# Altium PCB PCB2(final).PcbDoc
Units mm, origin at the board's own origin, x right, y up, seen from the top; angles counter-clockwise.
Board outline 48.9 x 47.37 mm, 2 copper layers (Top Layer, Bottom Layer); 15 components, 27 nets, 76 pads, 13 vias.
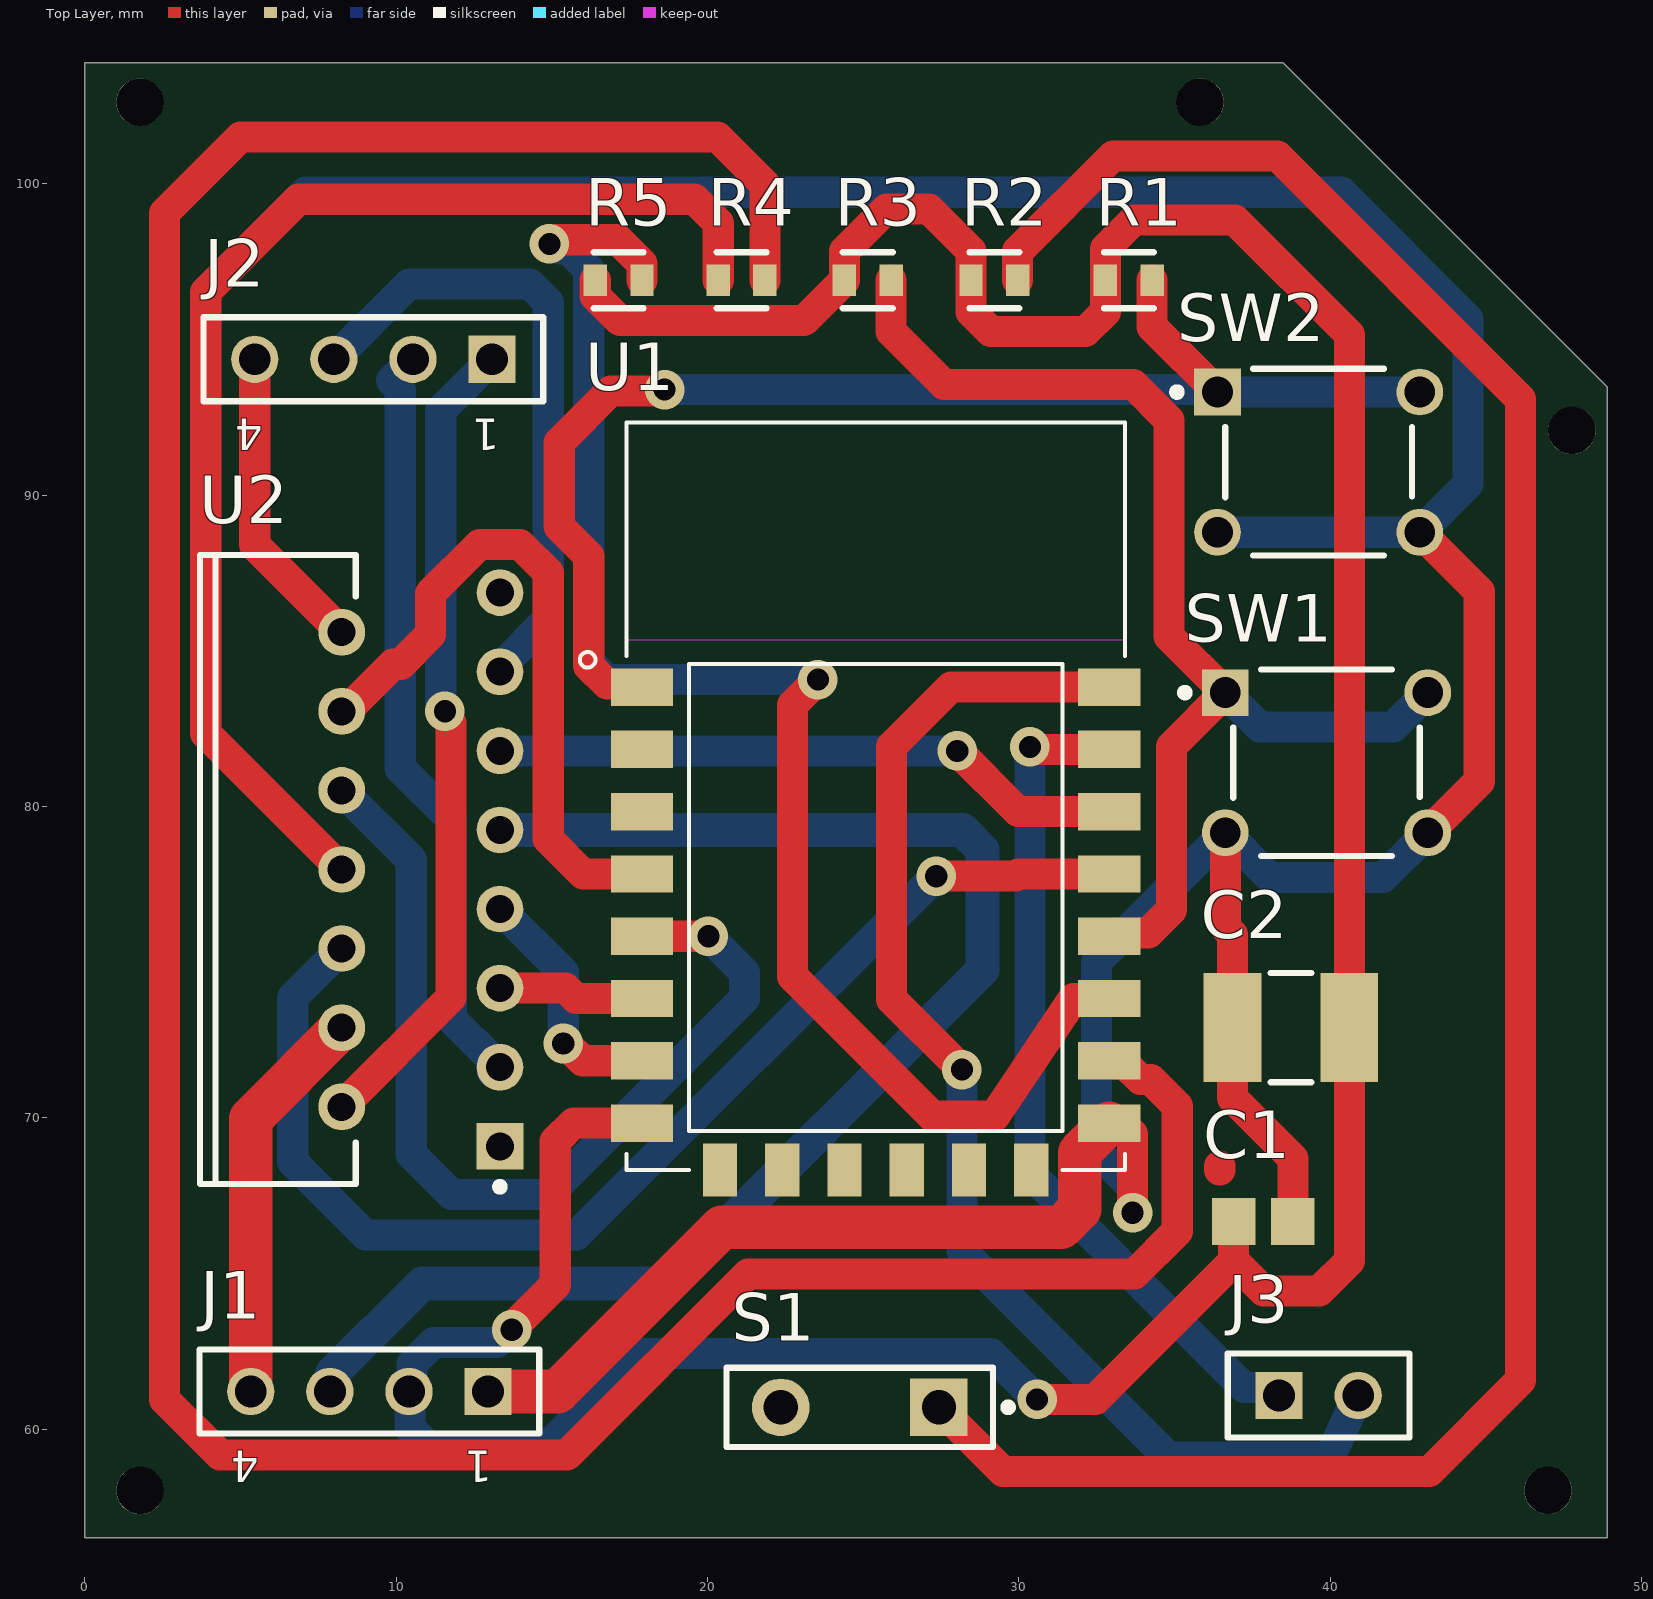
[diagram p0: Top Layer view]
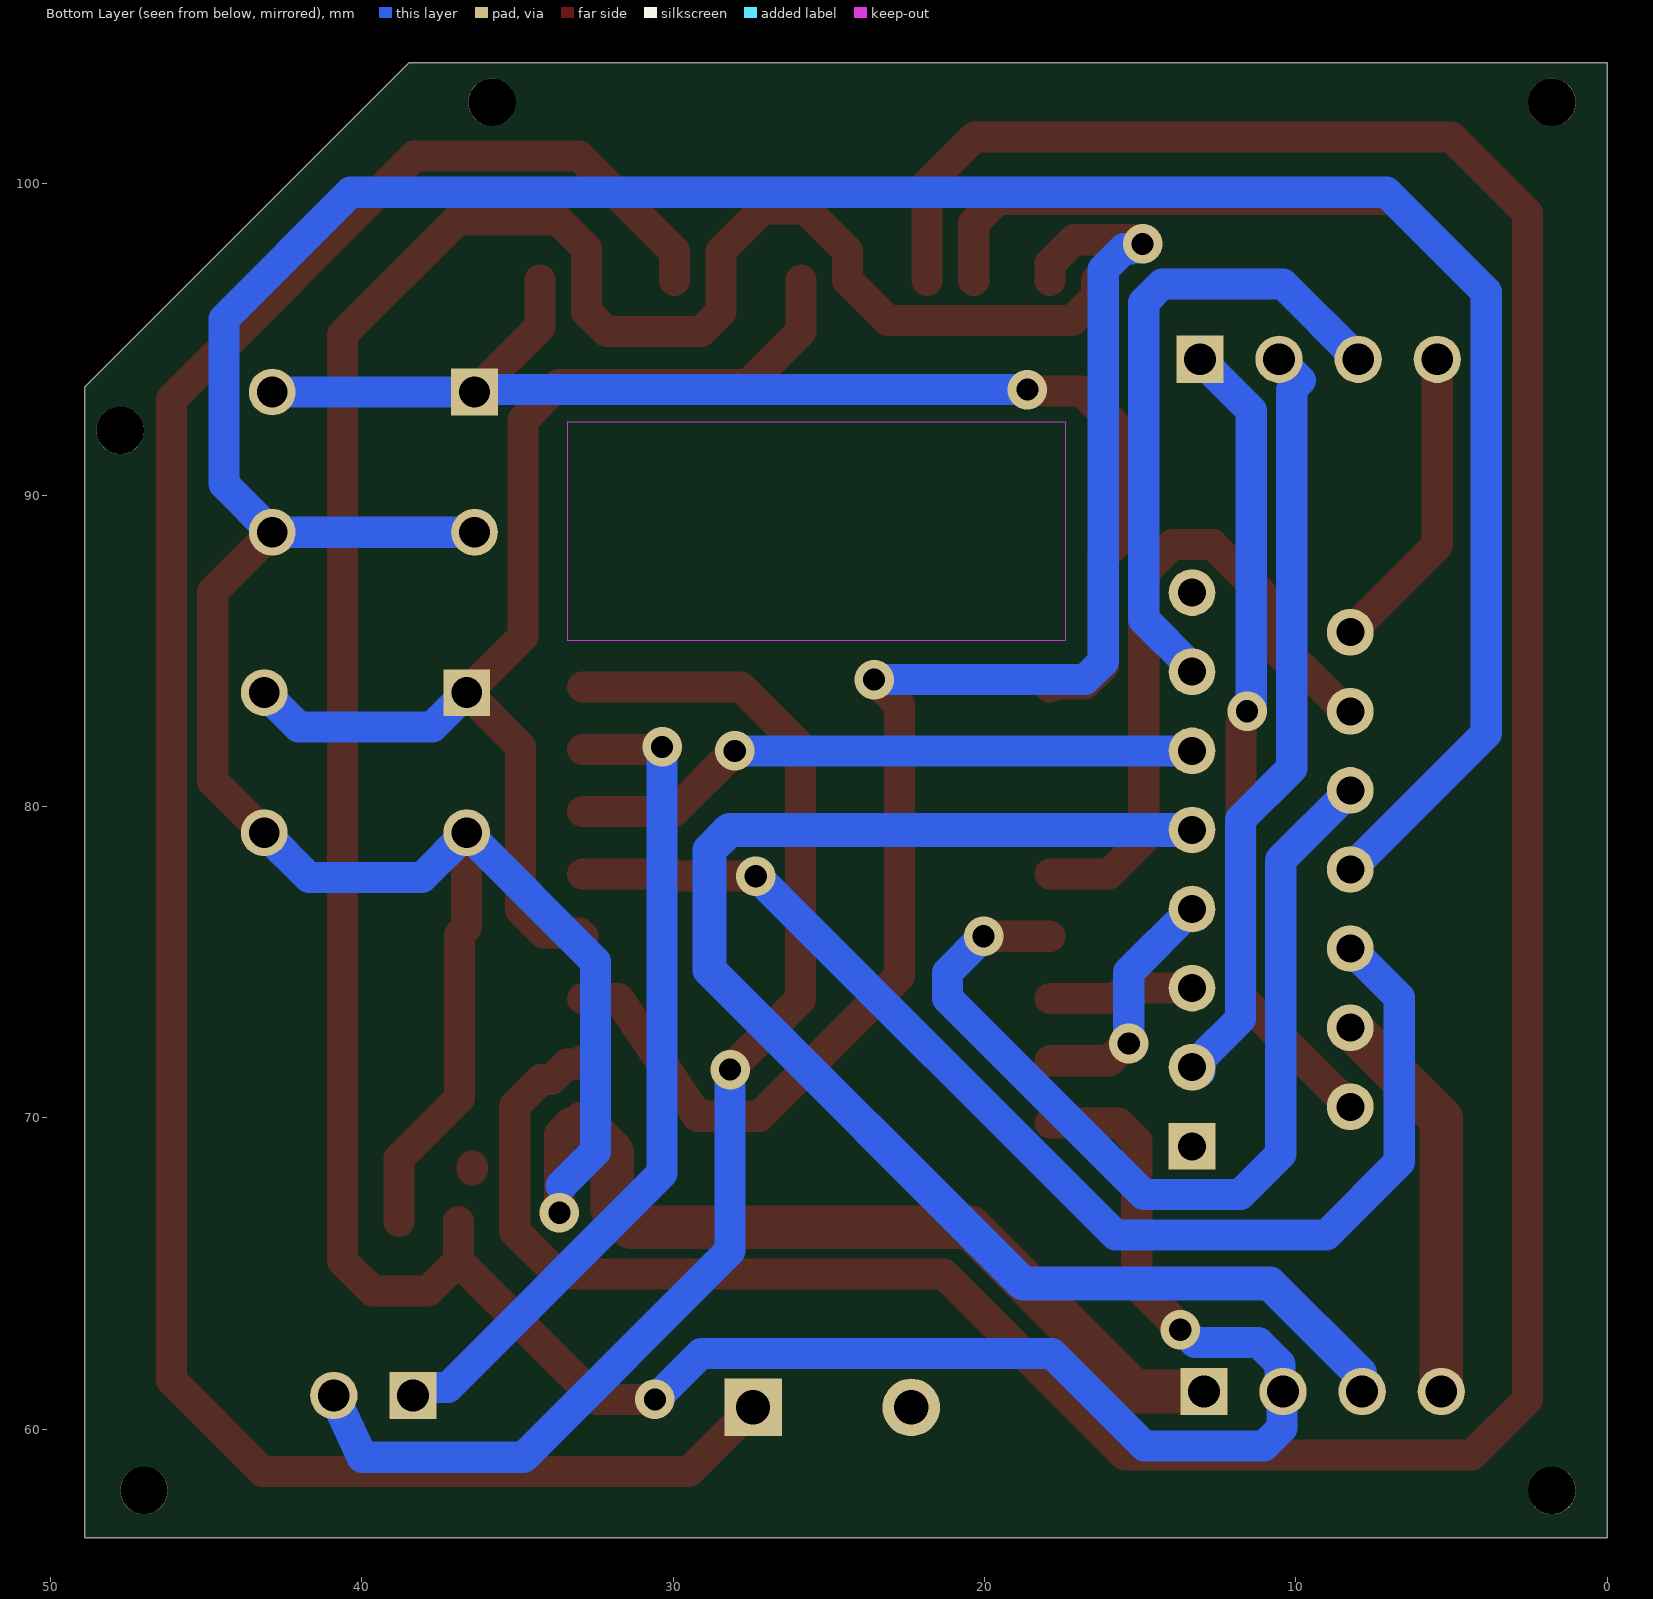
[diagram p1: Bottom Layer view, seen from below]
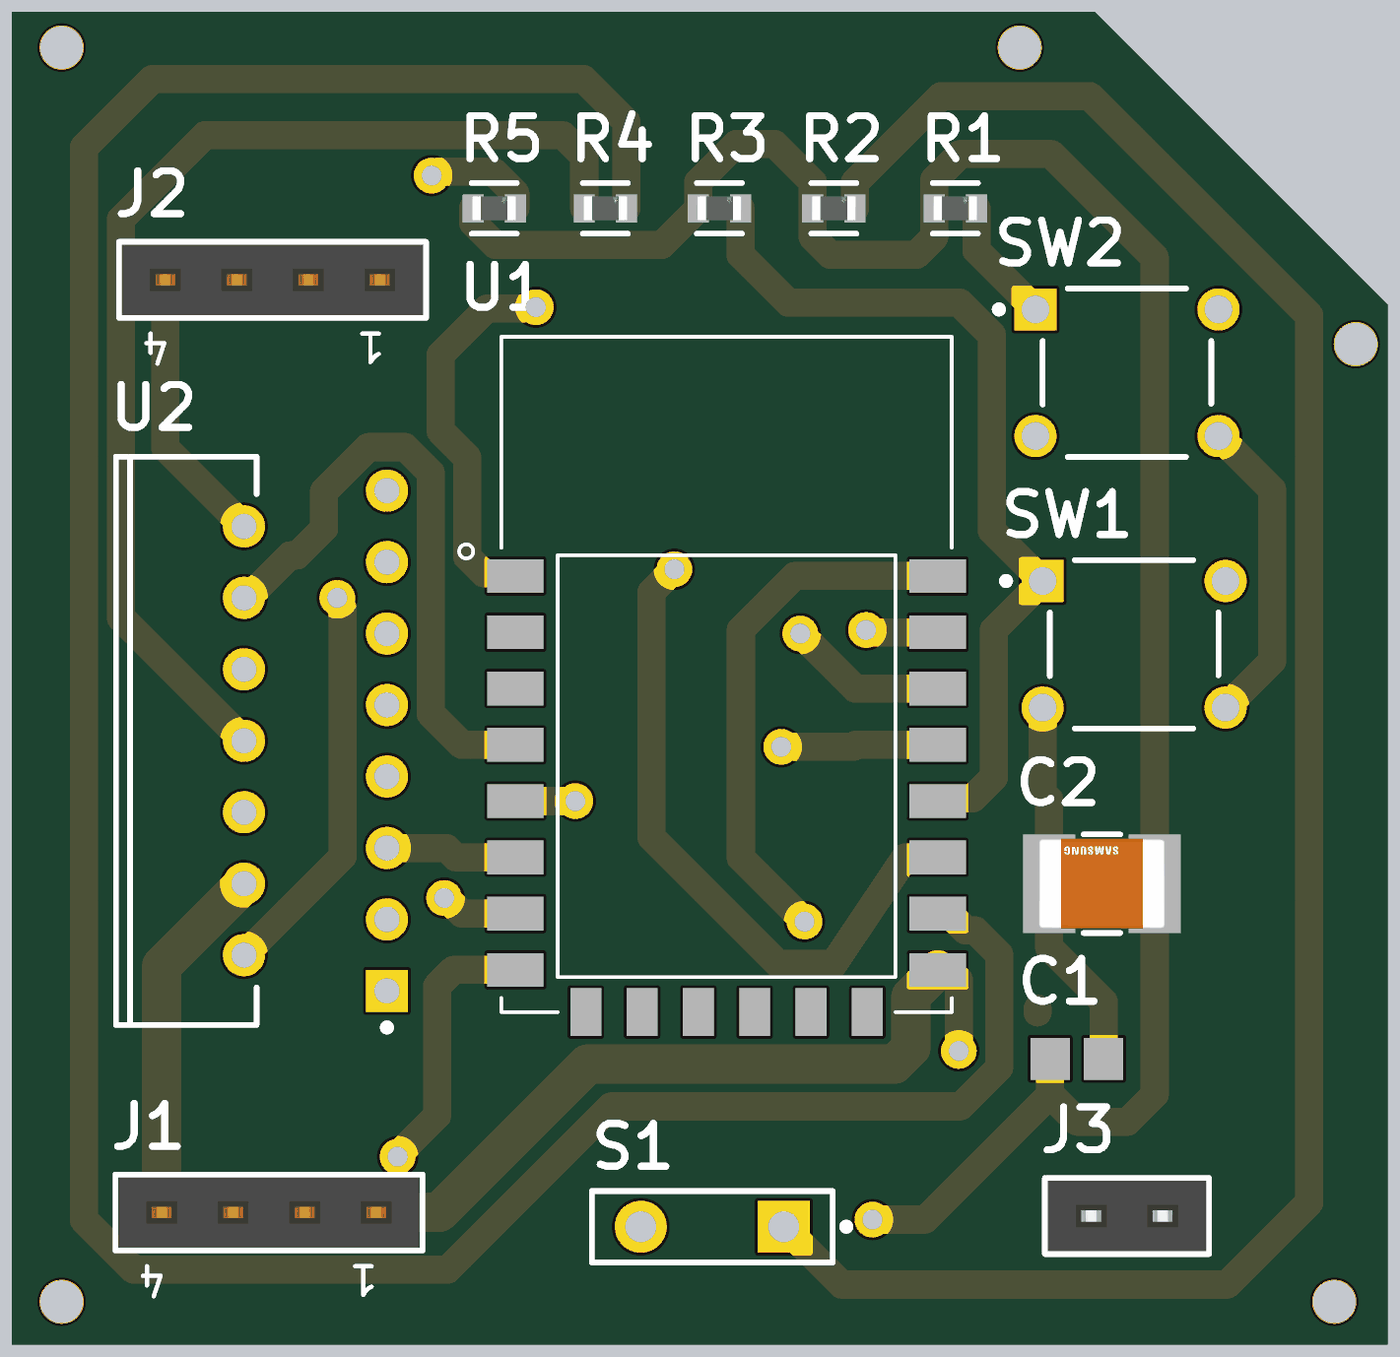
[diagram p2: 3D render of the assembled board from above, using the file's embedded part models]

## Layer stack, top to bottom
Top Solder: solder mask 0.0102, Solder Resist, Dk 3.5
Top Layer: signal copper 0.0356
Dielectric 1: dielectric 0.32, FR-4, Dk 4.8
Bottom Layer: signal copper 0.0356
Bottom Solder: solder mask 0.0102, Solder Resist, Dk 3.5

## Board outline
38.481,103.886 48.895,93.472 48.895,56.515 0,56.515 0,103.886

## Design rules (kind name [scope] priority, off if disabled: settings)
Clearance [All] p1: gap=0.3 ignorepadtopadclearanceinfootprint=FALSE except(0: Arc-Hole Track-Hole SMDPad-Hole THPad-Hole Via-Hole Fill-Hole Poly-Hole Region-Hole Text-Hole)
PolygonConnect [All] p1: connectstyle=Relief reliefconductorwidth=0.254 reliefentries=4 polygonreliefangle="90 Angle" airgapwidth=0.254
RoutingVias [All] p1: holewidth=0.711 width=1.27 viastyle="Through Hole" minholewidth=0.711 minwidth=1.27 maxholewidth=0.711 maxwidth=1.27
SilkToSolderMaskClearance [IsPad] p1: minsilkscreentomaskgap=0.127 clearancetoexposedcopper=TRUE
SolderMaskExpansion [All] p1: expansion=0.102 istentingtop=FALSE
Width [All] p1: maxlimit=1.5 minlimit=0.8 preferedwidth=1 minimp=50.000000 maximp=50.000000 favimp=50.000000
29 further rules are at their usual default settings.

## Components (designator, comment, footprint, x,y, rotation, side; value= is the part's Value field where it differs from the comment)
C1 "10uF" CAPC2013X95X45ML10T25 37.846,66.675 r180 top
C2 "100nF" FP-CL43-IPC_B 38.735,72.898 r180 top
J1 "61300411821" 61300411821 9.144,61.214 r180 top
J2 "61300411821" 61300411821 9.271,94.361 r180 top
J3 "61300211821" 61300211821 39.624,61.087 r0 top
R1 "CRCW060310K0JNEA" FP-CRCW0603-e3-MFG 33.528,96.901 r0 top
R2 "CRCW060310K0JNEA" FP-CRCW0603-e3-MFG 29.21,96.901 r0 top
R3 "CRCW060310K0JNEA" FP-CRCW0603-e3-MFG 25.146,96.901 r0 top
R4 "CRCW060310K0JNEA" FP-CRCW0603-e3-MFG 21.094,96.901 r0 top
R5 "CRCW060310K0JNEA" FP-CRCW0603-e3-MFG 17.145,96.901 r0 top
S1 "SW-SPST" SPST-2 24.892,60.706 r180 top
SW1 "1825910-6" TECO-1825910-6_V 39.878,81.407 r0 top
SW2 "1825910-6" TECO-1825910-6_V 39.624,91.059 r0 top
U1 "ESP8266-12E/ESP-12E" XCVR_ESP8266-12E/ESP-12E 25.4,76.835 r0 top
U2 "L298N" STM-FM-15 10.795,77.978 r180 top

## Footprints (in the part's own frame and the unit in brackets; to place one, negate y for a bottom-side part, rotate by r counter-clockwise, add the part's x,y. Pads: shape width x height; smd on the part's side, far side on the other; paste and mask are expansions set on the pad)
61300211821 [mm] "Socket Header, Pitch 2.54 mm, THT, Vertical, single row, 2p"
  rect 1.52x1.52 hole 1.02: 1(-1.27,0)
  round 1.52 hole 1.02: 2(1.27,0)
  silkscreen extent -2.92,-1.35 2.92,1.35, body extent -2.79,-1.25 2.79,1.25, height 8.55
61300411821 [mm] "Socket Header, Pitch 2.54 mm, THT, Vertical, single row, 4p"
  rect 1.52x1.52 hole 1.02: 1(-3.81,0)
  round 1.52 hole 1.02: 2(-1.27,0) 3(1.27,0) 4(3.81,0)
  silkscreen extent -5.46,-1.35 5.46,1.35, body extent -5.33,-1.25 5.33,1.25, height 8.55
CAPC2013X95X45ML10T25 [mm] "Chip Capacitor, 2-Leads, Body 2.00x1.25mm, IPC Low Density"
  rect 1.4x1.5 smd: 1(-0.95,0) 2(0.95,0)
  body extent -1.05,-0.67 1.05,0.67, height 0.95
FP-CL43-IPC_B [mm]
  rect 1.853x3.504 smd paste+0 mask+0: 1(-1.875,0) 2(1.875,0)
  silkscreen extent -0.65,-1.75 0.65,1.75, body extent -3.05,-2 3.05,2, height 0.25
FP-CRCW0603-e3-MFG [mm]
  rect 0.75x1 smd paste+0 mask+0: 1(-0.75,0) 2(0.75,0)
  silkscreen extent -0.8,-0.9 0.8,0.9, body extent -1.22,-0.6 1.22,0.6, height 0.25
SPST-2 [mm] "Switch; 2 Leads"
  rect 1.85x1.85 hole 1.1: 1(-2.54,0)
  round 1.85 hole 1.1: 2(2.54,0)
  silkscreen extent -4.89,-1.27 4.28,1.27
STM-FM-15 [mm] "FM, 15-Leads, Body 20.2x5mm, Pitch 1.27mm"
  rect 1.5x1.5 hole 0.9: 1(-2.54,8.89)
  round 1.5 hole 0.9: 2(2.54,7.62) 3(-2.54,6.35) 4(2.54,5.08) 5(-2.54,3.81) 6(2.54,2.54) 7(-2.54,1.27) 8(2.54,0) 9(-2.54,-1.27) 10(2.54,-2.54) 11(-2.54,-3.81) 12(2.54,-5.08) 13(-2.54,-6.35) 14(2.54,-7.62) 15(-2.54,-8.89)
  silkscreen extent -2.67,-10.1 7.09,10.31, body extent -2.8,-10.1 7.09,10.1, height 21
TECO-1825910-6_V [mm] "Switch, 4-Leads, Body 5.99x5.99mm"
  rect 1.5x1.5 hole 0.99: 1(-3.25,2.25)
  round 1.5 hole 0.99: 2(3.25,2.25) 3(-3.25,-2.25) 4(3.25,-2.25)
  silkscreen extent -4.67,-3 3,3, body extent -3,-2.99 2.99,3, height 5
XCVR_ESP8266-12E/ESP-12E [mm]
  rect 2x1.2 smd: 1(-7.5,7) 2(-7.5,5) 3(-7.5,3) 4(-7.5,1) 5(-7.5,-1) 6(-7.5,-3) 7(-7.5,-5) 8(-7.5,-7) 15(7.5,-7) 16(7.5,-5) 17(7.5,-3) 18(7.5,-1) 19(7.5,1) 20(7.5,3) 21(7.5,5) 22(7.5,7)
  rect 1.1x1.7 smd: 9(-5,-8.5) 10(-3,-8.5) 11(-1,-8.5) 12(1,-8.5) 13(3,-8.5) 14(5,-8.5)
  Keep-Out Layer region: 8,8.51 -8.009,8.51 -8.009,15.5 8,15.5
  Keep-Out Layer region: 8,8.51 -8.009,8.51 -8.009,15.5 8,15.5
  silkscreen extent -9.5,-8.5 8,15.5

## Part data
C1: library part CMP-2007-00182-1, Manufacturer=Murata, Part Number=GRM219R61E106KA12D
C2: library part CMP-13271-000927-1, "Cap Ceramic 100nF 500V X7R ±10% SMD 1812 +125°C Embossed T/R", Case/Package=1812, Dielectric=X7R, Max Operating Temperature=125°C, Min Operating Temperature=-55°C, Package Quantity=4000, Tolerance=10%, Voltage=500V, Capacitance=100nF, Depth=3.2mm, Height=2mm, Length=4.5mm, Mount="Surface Mount", Packaging="Tape and Reel", Radiation Hardening=No, Thickness=0.087inch, Voltage Rating=500V, Voltage Rating (DC)=500V, Width=0.126inch
J1 J2: "WR-PHD Socket Header, THT, pitch 2.54mm, Single Row, Vertical, 4p", Contact Resistance=20mOhm, Manufacturer="Wurth Elektronik", Operating Temperature="-40 to +125degC", Rated Current=3A, Withstanding Voltage=500VAC, Working Voltage=250VAC, ComponentLink1Description=Manufacturer, ComponentLink1URL=http://www.we-online.de, ComponentLink2Description=Datasheet, ComponentLink2URL=https://www.we-online.com/catalog/datasheet/61300411821.pdf, Gender="Socket Header", Manufacturer Part Number=61300411821, Mounting Technology=THT, Orientation=Vertical, Packaging=Tray, Pin Number=4, Pitch=2.54mm, Published Date="May 2020", Row Number=Single
J3: "WR-PHD Socket Header, THT, pitch 2.54mm, Single Row, Vertical, 2p", Contact Resistance=20mOhm, Manufacturer="Wurth Elektronik", Operating Temperature="-40 to +125degC", Rated Current=3A, Withstanding Voltage=500VAC, Working Voltage=250VAC, ComponentLink1Description=Manufacturer, ComponentLink1URL=http://www.we-online.de, ComponentLink2Description=Datasheet, ComponentLink2URL=https://www.we-online.com/catalog/datasheet/61300211821.pdf, Gender="Socket Header", Manufacturer Part Number=61300211821, Mounting Technology=THT, Orientation=Vertical, Packaging=Tray, Pin Number=2, Pitch=2.54mm, Published Date="May 2020", Row Number=Single
R1 R2 R3 R4 R5: library part CMP-2000-03838-2, "RES Thick Film, 10kΩ, 5%, 0.1W, 200ppm/°C, 0603", Case Code (Imperial)=0603, Case Code (Metric)=1608, Max Operating Temperature=155°C, Max Power Dissipation=100mW, Min Operating Temperature=-55°C, Package Quantity=1, Resistance=10kR, Temperature Coefficient=200ppm/°C, Tolerance=5%, Voltage Rating=75V, Case/Package=0603, Composition="Thick Film", Contact Plating=Tin, Depth=0.85mm, Features="Automotive AEC-Q200", Height=0.02inch, Lead Free="Lead Free", Length=1.55mm, Military Standard=Not, Mount="Surface Mount", Number of Pins=2, Number of Terminations=2, Packaging="Tape and Reel", Power Rating=100mW, Radiation Hardening=No, Termination=SMD/SMT, Voltage Rating (DC)=75V, Weight=7.1E-05oz, Width=0.033inch
S1: "Single-Pole, Single-Throw Switch", LatestRevisionDate=17-Jul-2002, LatestRevisionNote="Re-released for DXP Platform.", PackageDescription="Switch; 2 Leads", PackageReference=SPST-2, Published=24-Mar-1999, Publisher="Altium Limited"
SW1 SW2: library part CMP-1684-00021-1, "Tact Switch, SPST-NO, 0.05 A, -35 to 85 degC, 4-Pin THD, RoHS, Bulk", Actuator Color=Black, Contact Rating @ Voltage=0.05A@24VDC, Dielectric Strength=500VAC, Manufacturer="TE Connectivity", Maximum AC Voltage Rating=N/A, Maximum Contact Resistance=100mOhm, Maximum DC Voltage Rating=24V, Minimum Insulation Resistance=100MOhm, Operating Temperature=-35to85C, Package Description="4-Pin Through Hole Device, Body 5.99 x 5.99 mm, Pitch 6.5 mm", Package Reference=THD, Actuator Length=1.4mm, Actuator Material=PolybutyleneTerephthalate, Actuator Style=RoundButton, Base Material=N/A, Body Orientation=Straight, Bushing Type=Unthreaded, Contact Material=CopperAlloy, Contact Plating=Silver, Datasheet URL=http://www.te.com/commerce/DocumentDelivery/DDEController?Action=showdoc&DocId=Customer+Drawing%7F1825910%7FC9%7Fpdf%7FEnglish%7FENG_CD_1825910_C9.pdf%7F1825910-6, Datasheet Version="Rev. C9", Dimension=5.99x5mm, Electrical Life=100000Cycles, Family=1825910, Function=MomentaryContact, Housing Material=N/A, Illumination=N/R, Manufacturer URL=http://www.te.com, Mechanical Life=100000Cycles, Mounting=ThroughHole, Packaging=N/A, Part No=1825910-6, Pole Throw Configuration=SPST, Product Weight=N/A, RoHS=Yes, Seal Description=N/A, Seal Location=N/A, Switch Configuration=OFF(ON), Terminal Type=PCPins, Thread Size=N/R
U1: "This WiFi module has a 32-bit MCU micro and clock speeds supporting 80 MHz or 160 MHz. Supports the RTOS and integrated Wi-Fi MAC/BB/RF/PA/LNA, and has an on-board antenna.", Package=None, Availability=Unavailable, MF=AI-Thinker, MP=ESP8266-12E/ESP-12E, Price=None, SnapEDA_Link=https://www.snapeda.com/parts/ESP8266-12E/ESP-12E/AI-Thinker/view-part/106414/?ref=snap
U2: library part CMP-2000-06526-1, "Dual Full-Bridge Driver, 4.8 to 46 V, -40 to 150 degC, 15-Pin FM (MW 15L), RoHS, Tube", Driver Case Style=Multiwatt, Manufacturer=STMicroelectronics, Operating Temperature Max=130°C, Operating Temperature Min=-25°C, Output Current=2A, Output Voltage=46V, Package Description="15-Pin Flange Mount, Body 5 x 19.6 mm, Pitch 1.27 mm", Package Reference=FM-15, PartNumber=L298, Supply Voltage Max=7V, Supply Voltage Min=4.5V, Automotive Qualification Standard=-, Datasheet URL=https://datasheet.ciiva.com/15109/getdatasheetpartid-50682-15109332.pdf, Datasheet Version=01/2000, Manufacturer URL=http://www.st.com/, Motor Type=FullBridge, Mounting Technology=ThroughHole, MSL=-, No. of Outputs=4Outputs, No. of Pins=15Pins, Packaging=Each, Product Range=-, SVHC=NoSVHC(17-Dec-2015)

## Free pads (board coordinates)
  round 1.524 hole 1.524: 2(35.814,102.616) 2(47.752,92.075) 3(1.778,58.039) 4(46.99,58.039) 5(1.778,102.616)

## Via types
v1: diameter 1.27, hole 0.711, Top Layer to Bottom Layer, 13 vias

## Nets (pads, with @x,y where several pads share a name; then routed paths per layer and width w, separated by ;. In a path a pad name is that pad's centre, name@x,y a point inside that pad or via, vN(x,y) a via of type N, cw(c..) or ccw(c..) an arc to the next point about the centre after c; other vN are vias at no path point)
3.3V: C1.2 C2.1 J1.2 R1.1 R2.1 R3.1 R5.1 U1.8 | length 115.4
  Top Layer w1: v1(13.716,63.196) 13.716,63.246 15.113,64.643 15.113,69.249 15.699,69.835 U1.8 ; R5.1 16.395,96.395 17.189,95.601 23.096,95.601 R3.1 24.396,97.839 25.744,99.187 27.112,99.187 28.46,97.839 28.46,95.885 29.095,95.25 32.143,95.25 32.778,95.885 R1.1 32.778,97.917 33.692,98.831 36.932,98.831 40.61,95.153 C2.1 40.61,65.405 39.645,64.44 37.861,64.44 36.896,65.405 ; v1(30.582,60.96) 32.451,60.96 36.896,65.405 ; C1.2 36.896,65.405
  Bottom Layer w1: v1(13.716,63.196) 13.643,63.196 13.236,62.789 11.207,62.789 10.513,62.095 10.513,61.313 J1.2 10.443,61.185 10.443,60.047 11.029,59.461 14.859,59.461 17.831,62.433 29.108,62.433 v1(30.582,60.96)
ADC: U1.2
CS0: U1.9
EN: U1.3
GND: C1.1 C2.2 J1.1 R4.1 SW1.3 SW1.4 SW2.3 SW2.4 U1.15 U2.8 | length 191.8
  Top Layer w1: U2.8 3.886,82.347 3.886,96.52 6.867,99.501 19.582,99.501 20.344,98.739 R4.1 ; 30.353,66.485 30.363,66.485 ; U1.15 33.3,69.835 33.65,69.485 33.65,68.321 33.649,68.32 v1(33.649,66.955) ; SW1.3 36.628,76.127 36.86,75.895 C2.2 36.86,70.637 38.796,68.701 C1.1 ; SW2.4 44.78,86.903 44.78,80.809 SW1.4
  Top Layer w1.4: J1.1 15.184,61.214 20.455,66.485 30.353,66.485 ; 30.363,66.485 31.364,66.485 31.95,67.071 31.95,68.885 U1.15
  Bottom Layer w1: U2.8 3.886,82.347 3.886,96.52 7.091,99.725 40.356,99.725 44.425,95.656 44.425,90.36 SW2.4 SW2.3 ; 33.597,67.82 32.487,68.931 32.487,75.016 SW1.3 38.061,77.724 41.695,77.724 SW1.4
IO0: R3.2 SW1.1 SW1.2 U1.18 | length 38.7
  Top Layer w1: R3.2 25.896,95.25 27.598,93.548 33.68,93.548 34.823,92.405 34.823,85.462 SW1.1 34.9,81.929 34.9,76.683 34.152,75.935 33,75.935 U1.18
  Bottom Layer w1: SW1.1 37.735,82.55 42.021,82.55 SW1.2
IO2: R5.2 U1.17 | length 49.6
  Top Layer w1: v1(14.924,98.066) 14.997,98.066 15.132,98.201 17.122,98.201 17.895,97.428 R5.2 ; v1(23.546,84.074) 22.733,83.261 22.733,74.549 27.229,70.053 29.21,70.053 31.75,73.835 U1.17
  Bottom Layer w1: v1(14.924,98.066) 14.997,98.066 15.132,97.931 15.25,97.931 15.27,97.911 15.516,97.911 16.185,97.242 16.185,84.66 16.771,84.074 v1(23.546,84.074)
IO4: U1.19 U2.6 | length 39.5
  Top Layer w1: v1(27.344,77.763) 29.907,77.763 29.979,77.835 U1.19
  Bottom Layer w1: U2.6 6.68,73.863 6.68,68.58 9.022,66.238 15.797,66.238 27.322,77.763 v1(27.344,77.763)
IO5: U1.20 U2.11 | length 20.4
  Top Layer w1: v1(28.019,81.788) 29.972,79.835 U1.20
  Bottom Layer w1: U2.11 v1(28.019,81.788)
IO12: U1.6 U2.5 | length 4.7
  Top Layer w1: U2.5 15.443,74.168 15.776,73.835 U1.6
IO13: U1.7 U2.7 | length 7.9
  Top Layer w1: v1(15.367,72.39) 15.44,72.39 15.995,71.835 U1.7
  Bottom Layer w1: U2.7 15.367,74.676 v1(15.367,72.39)
IO14: U1.5 U2.10 | length 31.1
  Top Layer w1: U1.5 v1(20.028,75.835)
  Bottom Layer w1: U2.10 10.485,78.288 10.485,68.839 11.786,67.538 14.884,67.538 21.19,73.844 21.19,74.673 v1(20.028,75.835)
IO15: R4.2 U1.16 | length 105.1
  Top Layer w1: R4.2 21.844,99.974 20.32,101.498 5.004,101.498 2.565,99.06 2.565,60.96 4.343,59.182 15.494,59.182 21.297,64.985 33.707,64.985 35.084,66.361 35.084,70.383 34.231,71.235 33.9,71.235 33.4,71.735 33,71.735 U1.16
IO16: U1.4 U2.12 | length 22
  Top Layer w1: U2.12 8.39,83.058 9.9,84.568 10.148,84.568 11.1,85.519 11.1,86.843 12.675,88.418 13.977,88.418 14.885,87.51 14.885,78.952 16.002,77.835 U1.4
MISO: U1.10
MOSI: U1.13
NetR2_2: R2.2 S1.1 | length 73.8
  Top Layer w1: S1.1 29.489,58.649 43.18,58.649 46.101,61.57 46.101,93.091 38.303,100.889 33.02,100.889 29.96,97.829 R2.2
Out1: J2.1 U2.2 | length 26.3
  Top Layer w1: U2.2 11.76,73.863 11.76,82.676 11.705,82.732 11.705,82.85 11.57,82.985 v1(11.57,83.058)
  Bottom Layer w1: v1(11.57,83.058) 11.57,83.131 11.435,83.266 11.435,92.715 J2.1
Out2: J2.2 U2.3 | length 24.5
  Bottom Layer w1: J2.2 9.855,93.675 10.135,93.396 10.135,81.229 11.785,79.578 11.785,73.178 13.081,71.882 U2.3@13.081,71.501
Out3: J2.3 U2.13 | length 20.6
  Bottom Layer w1: J2.3 10.414,96.774 14.299,96.774 14.885,96.188 14.885,87.51 14.885,86.013 13.335,84.463 U2.13
Out4: J2.4 U2.14 | length 9.9
  Top Layer w1: J2.4 5.461,88.392 U2.14
RESET: R1.2 SW2.1 SW2.2 U1.1 | length 42.4
  Top Layer w1: U1.1 17.8,83.935 16.771,83.935 16.185,84.521 16.185,88.049 15.24,88.994 15.24,91.694 16.884,93.338 18.572,93.338 v1(18.624,93.389) ; R1.2 34.278,95.405 SW2.1
  Bottom Layer w1: v1(18.624,93.389) 36.124,93.389 SW2.1 SW2.2
RXD: J3.1 U1.21 | length 27.2
  Top Layer w1: v1(30.353,81.915) 30.426,81.915 30.506,81.835 U1.21
  Bottom Layer w1: v1(30.353,81.915) 30.353,68.222 37.228,61.347 38.094,61.347 J3.1
SCLK: U1.14
TXD: J3.2 U1.22 | length 41.6
  Top Layer w1: v1(28.169,71.552) 25.908,73.812 25.908,81.923 27.82,83.835 U1.22
  Bottom Layer w1: v1(28.169,71.552) 28.169,65.735 34.798,59.106 39.98,59.106 J3.2
Vs: J1.4 U2.4 | length 12.9
  Top Layer w1.4: J1.4 5.334,69.977 U2.4
Vss: J1.3 U2.9 | length 46.5
  Bottom Layer w1: 24.638,79.248 24.663,79.273
  Bottom Layer w1.1: J1.3 7.954,61.294 7.954,61.802 10.833,64.681 18.758,64.681 28.829,74.752 28.829,78.604 28.185,79.248 24.638,79.248 U2.9
pads on no net: S1.2 U1.11 U1.12 U2.1 U2.15
copper on no net: | length 0.1
  Top Layer w1: 36.449,68.326 36.449,68.453

## Text inside footprints (layer, text, board x,y; h text height)
J1: Top Overlay "1" at 13.081,59.309 h1.02 r180; Top Overlay "4" at 5.588,59.309 h1.02 r180
J2: Top Overlay "4" at 5.715,92.456 h1.02 r180; Top Overlay "1" at 13.335,92.456 h1.02 r180